# Altium PCB fpga.PcbDoc (part 3 of 6)
Units mm, origin at the board's own origin, x right, y up, seen from the top; angles counter-clockwise.
Board outline 111.63 x 111 mm, 2 copper layers (Top Layer, Bottom Layer); 5 components, 0 nets, 896 pads, 0 vias.
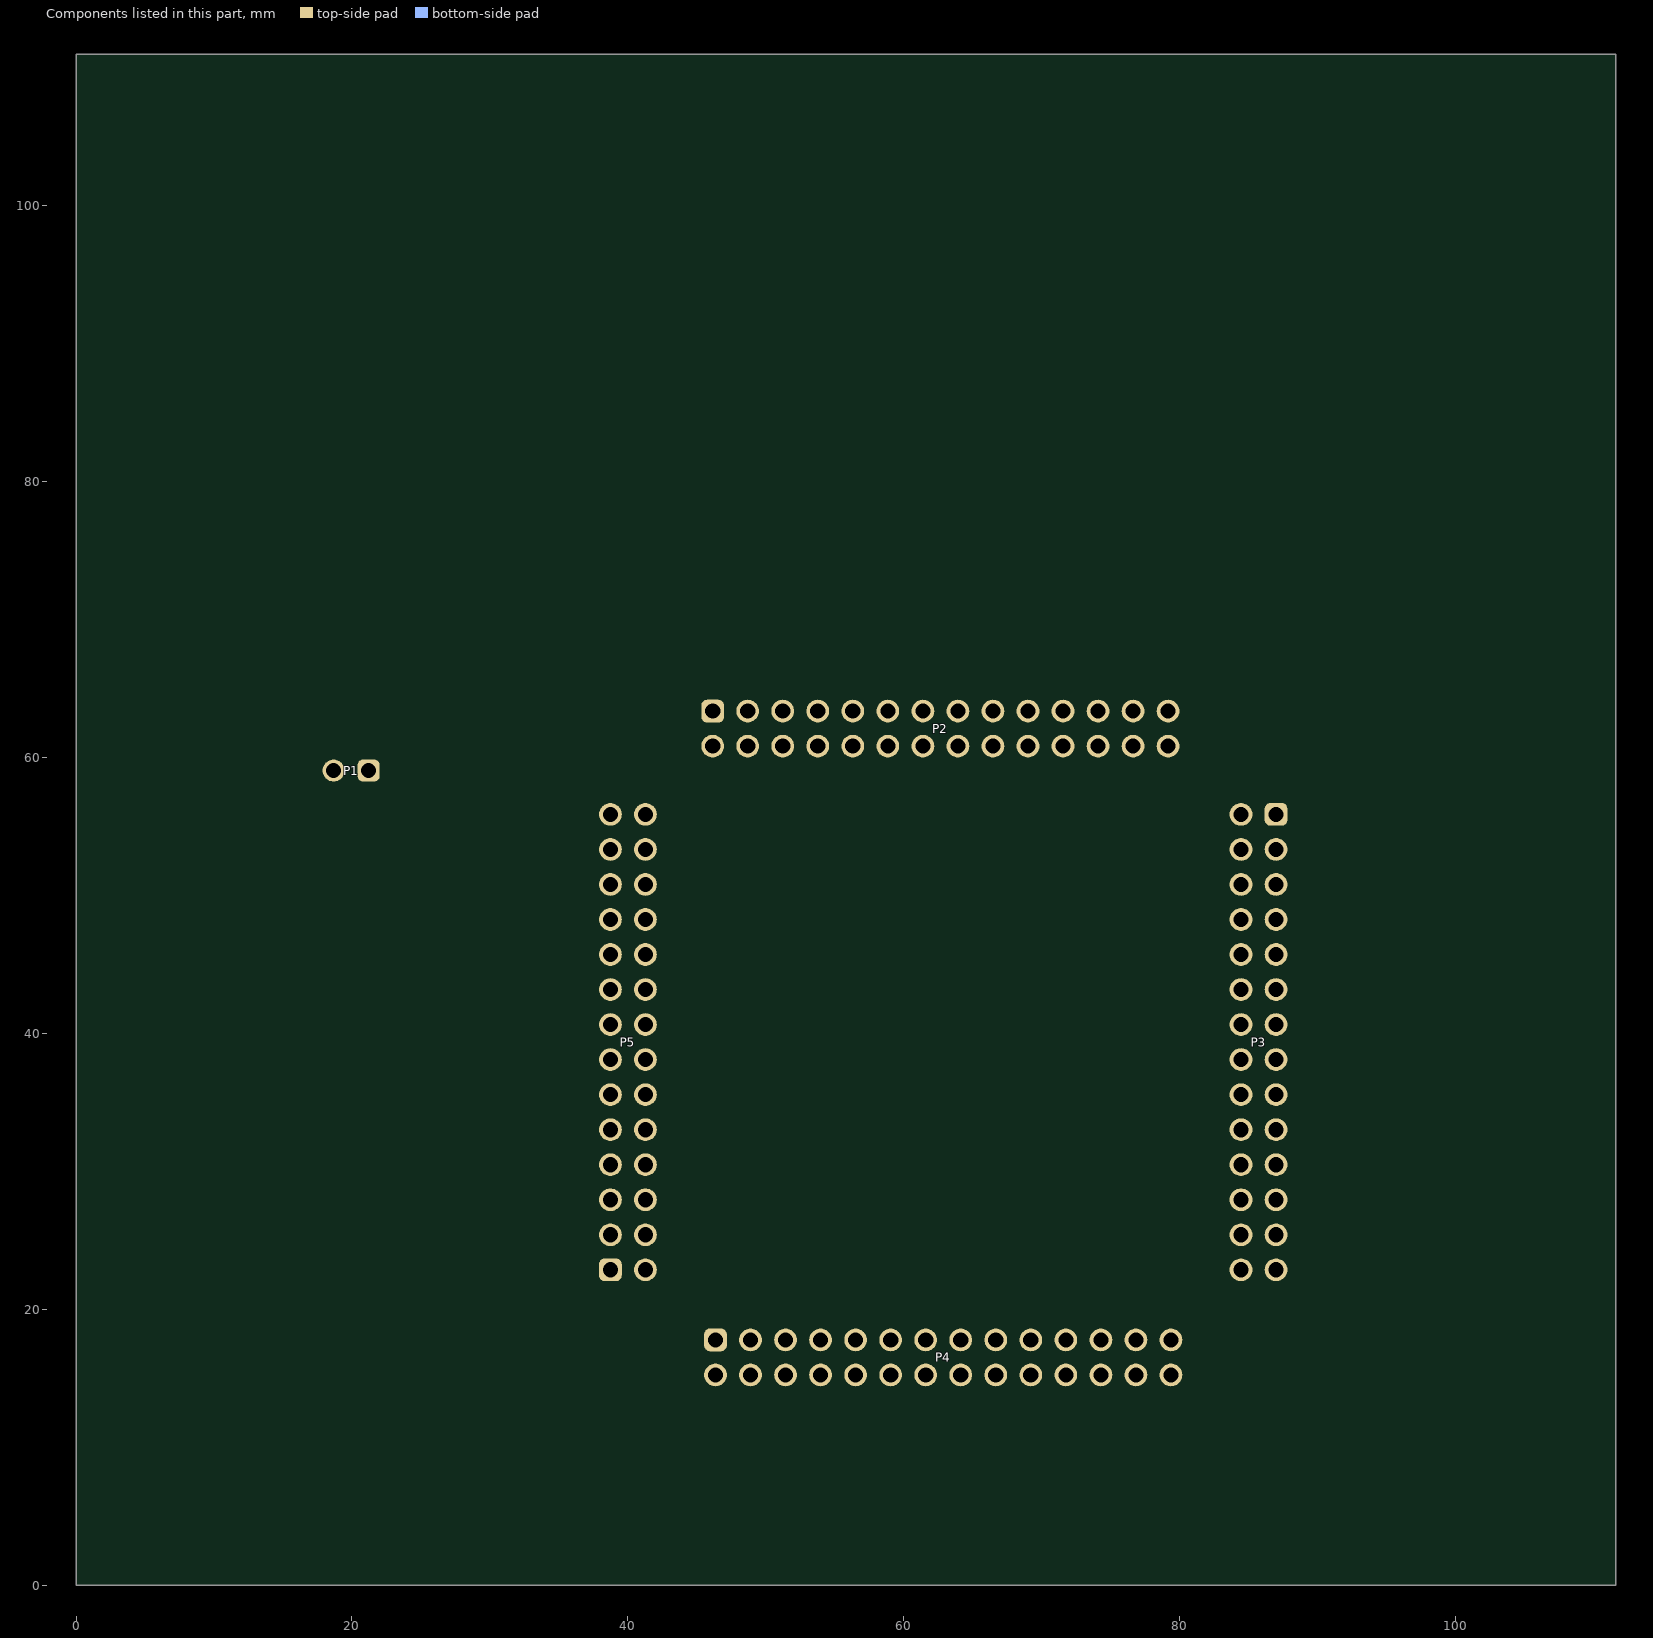
[diagram p3: the components of this part, seen from the top]

## Nets (pads, with @x,y where several pads share a name; then routed paths per layer and width w, separated by ;. In a path a pad name is that pad's centre, name@x,y a point inside that pad or via, vN(x,y) a via of type N, cw(c..) or ccw(c..) an arc to the next point about the centre after c; other vN are vias at no path point) (continued)
copper on no net: (continued)
  Top Layer w0.027: 13.047,38.27 13.047,37.995 ; 13.047,39.52 13.047,39.245 ; 13.047,40.42 13.047,40.695 ; 13.047,41.57 13.047,41.845 ; 13.047,42.42 13.022,42.445 ; 13.047,43.295 12.997,43.345 ; 13.047,44.17 13.047,44.445 ; 13.072,33.47 13.072,33.195 ; 13.072,33.845 13.097,33.82 ; 13.072,34.445 13.072,34.77 ; 13.072,34.72 13.097,34.695 ; 13.072,34.745 13.022,34.745 ; 13.072,35.295 13.072,35.57 ; 13.072,36.645 13.122,36.595 ; 13.072,36.67 13.022,36.67 ; 13.072,38.545 13.047,38.52 ; 13.072,39.245 13.072,39.52 ; 13.072,39.895 13.072,40.145 ; 13.072,40.42 13.097,40.395 ; 13.072,40.67 13.047,40.695 ; 13.072,41.02 13.097,40.995 ; 13.072,41.57 13.097,41.545 ; 13.072,41.82 13.047,41.845 ; 13.072,42.42 13.122,42.37 ; 13.072,42.445 13.022,42.445 ; 13.072,43.02 13.072,43.295 ; 13.072,44.42 13.047,44.445 ; 13.097,34.12 13.097,33.82 ; 13.097,35.545 13.072,35.57 ; 13.097,35.895 13.072,35.87 ; 13.097,36.045 13.072,36.07 ; 13.097,38.545 13.097,38.745 ; 13.097,39.495 13.072,39.52 ; 13.097,39.895 13.122,39.87 ; 13.097,40.12 13.072,40.145 ; 13.097,40.67 13.097,40.395 ; 13.097,41.82 13.097,41.545 ; 13.097,43.02 13.272,42.845 13.347,42.845 13.347,42.17 13.322,42.145 ; 13.097,43.27 13.072,43.295 ; 13.097,44.17 13.147,44.12 ; 13.122,33.82 13.147,33.795 ; 13.122,34.445 13.297,34.27 13.372,34.27 13.372,33.87 ; 13.122,35.295 13.247,35.17 13.322,35.17 13.322,35.045 ; 13.122,35.895 13.122,36.045 ; 13.122,36.345 13.222,36.245 13.297,36.245 ; 13.122,37.22 13.272,37.07 13.347,37.07 13.347,36.395 13.322,36.37 ; 13.122,37.995 13.247,37.87 13.322,37.87 13.322,37.745 13.422,37.745 13.422,37.295 13.372,37.245 ; 13.122,39.245 13.147,39.22 ; 13.122,41.245 13.097,41.27 ; 13.122,41.545 13.122,41.82 ; 13.122,42.12 13.322,41.92 13.397,41.92 13.397,41.52 ; 13.122,43.27 13.122,42.995 13.447,42.995 ; 13.122,44.42 13.122,44.145 13.297,44.145 ; 13.147,34.695 13.147,34.42 13.222,34.42 ; 13.147,35.545 13.147,35.27 13.247,35.27 13.272,35.295 ; 13.147,37.495 13.147,37.195 13.247,37.195 ; 13.147,38.27 13.147,37.97 13.247,37.97 ; 13.147,38.57 13.122,38.545 ; 13.147,39.495 13.147,39.22 ; 13.147,40.095 13.122,40.12 ; 13.147,41.545 13.172,41.52 ; 13.147,41.795 13.122,41.82 ; 13.147,43.27 13.147,42.97 13.247,42.97 ; 13.147,44.42 13.147,44.12 ; 13.172,33.795 13.222,33.745 ; 13.172,34.095 13.147,34.12 ; 13.172,34.695 13.172,34.395 13.247,34.395 13.247,34.32 13.322,34.32 13.322,33.87 ; 13.172,35.545 13.172,35.245 13.247,35.245 13.422,35.07 ; 13.172,35.92 13.147,35.895 ; 13.172,37.495 13.172,37.17 13.272,37.17 13.272,37.045 ; 13.172,38.27 13.172,37.945 13.272,37.945 ; 13.172,39.22 13.172,39.495 ; 13.172,40.395 13.172,40.67 ; 13.172,40.995 13.197,40.97 ; 13.172,41.795 13.172,41.52 ; 13.172,44.12 13.272,44.02 13.347,44.02 13.347,43.52 ; 13.172,44.795 13.172,44.77 13.272,44.77 13.272,44.67 13.372,44.67 ; 13.197,34.095 13.197,33.77 13.297,33.77 13.297,33.67 13.397,33.67 13.397,33.245 13.372,33.22 ; 13.197,34.695 13.197,34.37 13.272,34.37 13.272,34.295 13.347,34.295 13.347,33.87 ; 13.197,35.545 13.197,35.22 13.272,35.22 13.272,35.12 13.372,35.12 13.372,34.495 12.897,34.495 ; 13.197,35.92 13.347,35.77 13.447,35.77 ; 13.197,36.02 13.247,36.07 ; 13.197,37.495 13.197,37.145 13.297,37.145 13.297,37.02 13.397,37.02 13.397,36.42 12.847,36.42 ; 13.197,38.27 13.197,37.92 13.272,37.92 13.397,37.795 ; 13.197,39.47 13.172,39.495 ; 13.197,40.645 13.172,40.67 ; 13.197,43.545 13.197,43.82 ; 13.197,44.42 13.197,44.095 13.272,44.095 13.272,43.995 ; 13.197,44.795 13.197,44.745 13.297,44.745 13.297,44.62 ; 13.222,35.545 13.222,35.195 13.297,35.195 13.297,35.095 13.397,35.095 13.397,34.52 12.847,34.52 ; 13.222,37.495 13.222,37.12 13.322,37.12 ; 13.222,38.27 13.222,37.895 13.297,37.895 13.297,37.77 ; 13.222,41.22 13.197,41.245 ; 13.222,41.52 13.222,41.795 ; 13.222,43.245 13.222,42.895 13.322,42.895 ; 13.222,43.545 13.247,43.52 ; 13.222,43.795 13.197,43.82 ; 13.222,44.42 13.222,44.07 13.297,44.07 13.297,43.97 13.397,43.97 13.397,43.52 ; 13.222,44.795 13.222,44.72 13.322,44.72 13.322,44.17 13.297,44.145 ; 13.247,33.47 13.322,33.545 13.497,33.545 ; 13.247,33.745 13.272,33.72 13.347,33.72 13.347,33.22 13.322,33.195 ; 13.247,33.795 13.222,33.82 13.097,33.82 ; 13.247,35.545 13.247,35.145 ; 13.247,36.095 13.322,36.095 ; 13.247,36.17 13.322,36.17 ; 13.247,36.195 13.222,36.22 ; 13.247,39.22 13.272,39.195 ; 13.247,41.77 13.222,41.795 ; 13.247,43.245 13.247,42.87 13.322,42.87 13.422,42.77 ; 13.247,43.795 13.247,43.52 ; 13.272,33.195 13.272,33.495 13.497,33.495 13.522,33.47 ; 13.272,34.12 13.322,34.17 13.472,34.17 ; 13.272,38.87 13.322,38.87 ; 13.272,38.895 13.072,39.095 13.072,39.17 12.947,39.17 ; 13.272,40.97 13.297,40.945 ; 13.272,42.995 13.247,42.97 ; 13.297,33.195 13.297,33.52 13.497,33.52 ; 13.297,33.87 13.297,34.145 13.472,34.145 13.497,34.12 ; 13.297,35.545 13.372,35.62 ; 13.297,36.07 13.322,36.095 ; 13.297,36.195 13.322,36.17 ; 13.297,36.22 13.222,36.22 ; 13.297,36.37 13.297,36.695 13.522,36.695 ; 13.297,38.02 13.247,37.97 ; 13.297,38.295 13.372,38.37 ; 13.297,38.895 13.322,38.87 ; 13.297,38.92 13.247,38.92 13.247,39.02 13.147,39.02 13.147,39.12 ; 13.297,39.445 13.272,39.47 ; 13.297,41.77 13.347,41.82 13.472,41.82 13.472,41.545 ; 13.297,42.145 13.297,42.47 13.522,42.47 ; 13.297,43.795 13.347,43.845 ; 13.297,44.645 13.147,44.795 13.247,44.795 ; 13.322,33.595 13.472,33.595 ; 13.322,33.62 13.447,33.62 13.447,33.27 12.897,33.27 ; 13.322,34.195 13.447,34.195 13.447,33.895 ; 13.322,34.47 13.322,34.82 ; 13.322,34.795 13.222,34.695 13.222,34.345 13.297,34.345 13.297,34.245 ; 13.322,35.295 13.322,35.57 13.522,35.57 ; 13.322,36.72 13.247,36.645 13.247,36.345 13.072,36.345 ; 13.322,38.02 13.322,38.32 13.522,38.32 ; 13.322,41.195 13.297,41.22 ; 13.322,41.52 13.322,41.795 13.497,41.795 ; 13.322,42.495 13.247,42.42 13.247,41.995 13.347,41.995 ; 13.322,43.52 13.322,43.82 13.497,43.82 ; 13.322,44.495 13.247,44.42 13.247,44.045 13.322,44.045 13.322,43.945 13.422,43.945 ; 13.322,44.52 13.472,44.52 ; 13.322,44.57 13.447,44.57 ; 13.347,34.92 13.497,34.92 ; 13.347,34.97 13.472,34.97 ; 13.347,36.845 13.497,36.845 ; 13.347,36.92 13.472,36.92 ; 13.347,37.245 13.347,37.845 13.247,37.845 ; 13.347,37.595 13.247,37.495 13.247,37.095 13.322,37.095 13.422,36.995 ; 13.347,37.62 13.497,37.62 ; 13.347,37.67 13.472,37.67 ; 13.347,39.445 13.447,39.545 ; 13.347,41.52 13.347,41.995 ; 13.347,42.62 13.497,42.62 ; 13.347,42.695 13.472,42.695 ; 13.347,43.87 13.472,43.87 ; 13.347,43.895 13.447,43.895 13.447,43.545 ; 13.347,43.92 13.272,43.995 ; 13.347,44.17 13.347,44.695 13.247,44.695 13.247,44.795 ; 13.372,35.67 13.497,35.67 ; 13.372,38.42 13.497,38.42 ; 13.372,41.52 13.372,41.945 13.297,41.945 13.297,42.045 13.197,42.045 13.197,42.395 13.222,42.42 ; 13.372,43.52 13.372,43.995 13.272,43.995 ; 13.372,44.645 13.447,44.57 ; 13.422,39.17 13.422,39.52 13.497,39.52 ; 13.422,43.92 13.472,43.87 ; 13.447,34.995 13.472,34.97 ; 13.447,37.695 13.472,37.67 ; 13.447,39.17 13.447,39.87 ; 13.447,39.57 13.522,39.57 ; 13.447,39.645 13.422,39.67 ; 13.447,40.395 13.447,40.645 ; 13.447,41.845 13.497,41.795 ; 13.447,43.245 13.447,42.995 ; 13.447,44.545 13.472,44.52 ; 13.472,33.57 13.497,33.545 ; 13.472,34.945 13.497,34.92 ; 13.472,35.695 13.497,35.67 ; 13.472,36.87 13.497,36.845 ; 13.472,37.645 13.497,37.62 ; 13.472,38.445 13.497,38.42 ; 13.472,39.42 13.447,39.445 ; 13.472,40.395 13.472,40.62 ; 13.472,40.57 12.572,40.57 12.572,40.82 ; 13.472,40.92 13.472,41.17 12.522,41.17 ; 13.472,41.12 12.547,41.12 ; 13.472,41.145 12.547,41.145 12.522,41.17 ; 13.472,42.645 13.497,42.62 ; 13.472,43.17 12.597,43.17 ; 13.472,43.195 12.572,43.195 ; 13.472,43.845 13.497,43.82 ; 13.472,44.495 13.497,44.47 ; 13.497,34.87 13.522,34.845 ; 13.497,35.62 13.522,35.595 ; 13.497,36.57 12.672,36.57 12.672,36.695 12.572,36.695 ; 13.497,36.795 13.522,36.77 ; 13.497,38.17 12.722,38.17 12.722,38.37 ; 13.497,38.37 13.522,38.345 ; 13.497,39.17 13.522,39.145 ; 13.497,39.545 13.522,39.57 ; 13.497,40.395 13.497,40.52 ; 13.497,40.47 12.822,40.47 ; 13.497,40.495 12.747,40.495 ; 13.497,40.97 13.197,40.97 ; 13.497,40.995 13.097,40.995 ; 13.497,41.02 12.972,41.02 ; 13.497,41.045 12.822,41.045 ; 13.497,42.345 12.672,42.345 12.672,42.47 12.572,42.47 ; 13.497,42.57 13.522,42.545 ; 13.497,43.02 13.497,43.12 ; 13.497,43.07 12.822,43.07 ; 13.497,43.095 12.772,43.095 ; 13.497,43.795 12.522,43.795 ; 13.522,33.395 12.722,33.395 12.722,33.62 12.547,33.62 ; 13.522,33.42 12.697,33.42 12.697,33.645 ; 13.522,33.445 12.672,33.445 12.672,33.645 12.622,33.695 12.522,33.695 ; 13.522,34.02 12.297,34.02 ; 13.522,34.045 12.197,34.045 ; 13.522,34.72 13.247,34.72 13.247,34.445 13.222,34.42 ; 13.522,34.745 13.272,34.745 13.272,34.445 ; 13.522,34.77 13.297,34.77 13.297,34.47 13.272,34.445 ; 13.522,34.82 13.322,34.82 ; 13.522,36.645 13.222,36.645 ; 13.522,36.67 13.272,36.67 13.272,36.37 13.222,36.32 ; 13.522,36.745 13.322,36.745 ; 13.522,37.445 12.222,37.445 ; 13.522,37.47 12.172,37.47 ; 13.522,37.495 12.122,37.495 ; 13.522,37.52 13.272,37.52 13.272,37.22 13.247,37.195 ; 13.522,38.245 12.647,38.245 12.647,38.42 12.547,38.42 ; 13.522,38.27 12.622,38.27 ; 13.522,38.295 13.272,38.295 ; 13.522,39.42 13.522,39.145 ; 13.522,39.67 13.422,39.67 ; 13.522,41.645 12.572,41.645 12.572,41.87 12.597,41.895 ; 13.522,41.67 12.547,41.67 ; 13.522,42.42 13.222,42.42 ; 13.522,42.445 13.272,42.445 13.272,42.145 13.247,42.12 13.072,42.12 ; 13.522,42.52 13.322,42.52 ; 13.522,43.67 12.597,43.67 12.572,43.695 ; 13.522,43.695 12.572,43.695 ; 13.522,43.72 12.572,43.72 12.547,43.745 ; 13.522,44.345 12.422,44.345 ; 13.522,44.37 12.347,44.37 ; 13.522,44.395 12.247,44.395 ; 13.547,39.145 13.547,39.42 ; 13.572,39.395 13.547,39.42 ; 13.622,39.145 13.647,39.12 ; 13.672,39.37 13.647,39.395 ; 13.772,39.12 13.797,39.095 ; 13.822,39.345 13.797,39.37 ; 13.922,39.095 13.947,39.07 ; 13.972,39.32 13.947,39.345 ; 14.047,39.07 14.047,39.32 12.722,39.32 12.722,39.695 ; 14.047,39.27 12.797,39.27 ; 14.047,39.295 12.747,39.295 ; 14.072,39.12 13.647,39.12 ; 14.072,39.145 13.522,39.145 ; 14.072,39.17 13.397,39.17 ; 14.072,39.195 13.272,39.195 ; 14.272,20.995 14.297,21.02 ; 14.272,45.395 14.297,45.37 ; 14.322,20.92 14.297,20.895 ; 14.322,45.47 14.297,45.495 ; 14.472,20.995 14.447,20.97 ; 14.472,21.12 14.497,21.145 ; 14.497,20.995 14.497,21.195 ; 14.522,21.07 14.497,21.045 14.372,21.045 14.372,20.945 14.347,20.92 ; 14.522,21.195 14.547,21.22 14.522,21.245 ; 14.547,21.07 14.547,45.345 14.372,45.345 14.372,45.445 14.347,45.47 ; 14.547,45.32 14.397,45.32 14.397,45.445 ; 14.597,21.195 14.497,21.195 ; 14.597,21.22 14.622,21.245 14.622,45.145 14.597,45.17 ; 14.597,45.195 14.522,45.195 14.522,45.345 14.497,45.37 14.297,45.37 ; 14.597,45.22 14.472,45.22 14.497,45.245 14.447,45.295 14.447,45.445 14.422,45.42 ; 2.772,21.195 2.897,21.195 2.922,21.22 ; 2.772,21.195 2.797,21.22 ; 2.772,21.195 2.847,21.12 2.822,21.095 2.997,21.095 2.997,20.945 ; 2.772,21.245 2.897,21.245 ; 2.772,21.245 2.797,21.27 2.772,21.295 ; 2.772,21.245 2.797,21.22 ; 2.772,21.295 2.797,21.32 2.772,21.345 ; 2.772,21.345 2.797,21.37 2.772,21.395 ; 2.772,21.395 2.797,21.42 2.772,21.445 ; 2.772,21.445 2.797,21.47 2.772,21.495 ; 2.772,21.495 2.797,21.52 2.772,21.545 ; 2.772,21.545 2.797,21.57 2.772,21.595 ; 2.772,21.595 2.797,21.62 2.772,21.645 ; 2.772,21.645 2.797,21.67 2.772,21.695 ; 2.772,21.695 2.797,21.72 2.772,21.745 ; 2.772,21.745 2.797,21.77 2.772,21.795 ; 2.772,21.795 2.797,21.82 2.772,21.845 ; 2.772,21.845 2.797,21.87 2.772,21.895 ; 2.772,21.895 2.797,21.92 2.772,21.945 ; 2.772,21.945 2.797,21.97 2.772,21.995 ; 2.772,21.995 2.797,22.02 2.772,22.045 ; 2.772,22.045 2.797,22.07 2.772,22.095 ; 2.772,22.095 2.797,22.12 2.772,22.145 ; 2.772,22.145 2.797,22.17 2.772,22.195 ; 2.772,22.195 2.797,22.22 2.772,22.245 ; 2.772,22.245 2.797,22.27 2.772,22.295 ; 2.772,22.295 2.797,22.32 2.772,22.345 ; 2.772,22.345 2.797,22.37 2.772,22.395 ; 2.772,22.395 2.797,22.42 2.772,22.445 ; 2.772,22.445 2.797,22.47 2.772,22.495 ; 2.772,22.495 2.797,22.52 2.772,22.545 ; 2.772,22.545 2.797,22.57 2.772,22.595 ; 2.772,22.595 2.797,22.62 2.772,22.645 ; 2.772,22.645 2.797,22.67 2.772,22.695 ; 2.772,22.695 2.797,22.72 2.772,22.745 ; 2.772,22.745 2.797,22.77 2.772,22.795 ; 2.772,22.795 2.797,22.82 2.772,22.845 ; 2.772,22.845 2.797,22.87 2.772,22.895 ; 2.772,22.895 2.797,22.92 2.772,22.945 ; 2.772,22.945 2.797,22.97 2.772,22.995 ; 2.772,22.995 2.797,23.02 2.772,23.045 ; 2.772,23.045 2.797,23.07 2.772,23.095 ; 2.772,23.095 2.797,23.12 2.772,23.145 ; 2.772,23.145 2.797,23.17 2.772,23.195 ; 2.772,23.195 2.797,23.22 2.772,23.245 ; 2.772,23.245 2.797,23.27 2.772,23.295 ; 2.772,23.295 2.797,23.32 2.772,23.345 ; 2.772,23.345 2.797,23.37 2.772,23.395 ; 2.772,23.395 2.797,23.42 2.772,23.445 ; 2.772,23.445 2.797,23.47 2.772,23.495 ; 2.772,23.495 2.797,23.52 2.772,23.545 ; 2.772,23.545 2.797,23.57 2.772,23.595 ; 2.772,23.595 2.797,23.62 2.772,23.645 ; 2.772,23.645 2.797,23.67 2.772,23.695 ; 2.772,23.695 2.797,23.72 2.772,23.745 ; 2.772,23.745 2.797,23.77 2.772,23.795 ; 2.772,23.795 2.797,23.82 2.772,23.845 ; 2.772,23.845 2.797,23.87 2.772,23.895 ; 2.772,23.895 2.797,23.92 2.772,23.945 ; 2.772,23.945 2.797,23.97 2.772,23.995 ; 2.772,23.995 2.797,24.02 2.772,24.045 ; 2.772,24.045 2.797,24.07 2.772,24.095 ; 2.772,24.095 2.797,24.12 2.772,24.145 ; 2.772,24.145 2.797,24.17 2.772,24.195 ; 2.772,24.195 2.797,24.22 2.772,24.245 ; 2.772,24.245 2.797,24.27 2.772,24.295 ; 2.772,24.295 2.797,24.32 2.772,24.345 ; 2.772,24.345 2.797,24.37 2.772,24.395 ; 2.772,24.395 2.797,24.42 2.772,24.445 ; 2.772,24.445 2.797,24.47 2.772,24.495 ; 2.772,24.495 2.797,24.52 2.772,24.545 ; 2.772,24.545 2.797,24.57 2.772,24.595 ; 2.772,24.595 2.797,24.62 2.772,24.645 ; 2.772,24.645 2.797,24.67 2.772,24.695 ; 2.772,24.695 2.797,24.72 2.772,24.745 ; 2.772,24.745 2.797,24.77 2.772,24.795 ; 2.772,24.795 2.797,24.82 2.772,24.845 ; 2.772,24.845 2.797,24.87 2.772,24.895 ; 2.772,24.895 2.797,24.92 2.772,24.945 ; 2.772,24.945 2.797,24.97 2.772,24.995 ; 2.772,24.995 2.797,25.02 2.772,25.045 ; 2.772,25.045 2.797,25.07 2.772,25.095 ; 2.772,25.095 2.797,25.12 2.772,25.145 ; 2.772,25.145 2.797,25.17 2.772,25.195 ; 2.772,25.195 2.797,25.22 2.772,25.245 ; 2.772,25.245 2.797,25.27 2.772,25.295 ; 2.772,25.295 2.797,25.32 2.772,25.345 ; 2.772,25.345 2.797,25.37 2.772,25.395 ; 2.772,25.395 2.797,25.42 2.772,25.445 ; 2.772,25.445 2.797,25.47 2.772,25.495 ; 2.772,25.495 2.797,25.52 2.772,25.545 ; 2.772,25.545 2.797,25.57 2.772,25.595 ; 2.772,25.595 2.797,25.62 2.772,25.645 ; 2.772,25.645 2.797,25.67 2.772,25.695 ; 2.772,25.695 2.797,25.72 2.772,25.745 ; 2.772,25.745 2.797,25.77 2.772,25.795 ; 2.772,25.795 2.797,25.82 2.772,25.845 ; 2.772,25.845 2.797,25.87 2.772,25.895 ; 2.772,25.895 2.797,25.92 2.772,25.945 ; 2.772,25.945 2.797,25.97 2.772,25.995 ; 2.772,25.995 2.797,26.02 2.772,26.045 ; 2.772,26.045 2.797,26.07 2.772,26.095 ; 2.772,26.095 2.797,26.12 2.772,26.145 ; 2.772,26.145 2.797,26.17 2.772,26.195 ; 2.772,26.195 2.797,26.22 2.772,26.245 ; 2.772,26.245 2.797,26.27 2.772,26.295 ; 2.772,26.295 2.797,26.32 2.772,26.345 ; 2.772,26.345 2.797,26.37 2.772,26.395 ; 2.772,26.395 2.797,26.42 2.772,26.445 ; 2.772,26.445 2.797,26.47 2.772,26.495 ; 2.772,26.495 2.797,26.52 2.772,26.545 ; 2.772,26.545 2.797,26.57 2.772,26.595 ; 2.772,26.595 2.797,26.62 2.772,26.645 ; 2.772,26.645 2.797,26.67 2.772,26.695 ; 2.772,26.695 2.797,26.72 2.772,26.745 ; 2.772,26.745 2.797,26.77 2.772,26.795 ; 2.772,26.795 2.797,26.82 2.772,26.845 ; 2.772,26.845 2.797,26.87 2.772,26.895 ; 2.772,26.895 2.797,26.92 2.772,26.945 ; 2.772,26.945 2.797,26.97 2.772,26.995 ; 2.772,26.995 2.797,27.02 2.772,27.045 ; 2.772,27.045 2.797,27.07 2.772,27.095 ; 2.772,27.095 2.797,27.12 2.772,27.145 ; 2.772,27.145 2.797,27.17 2.772,27.195 ; 2.772,27.195 2.797,27.22 2.772,27.245 ; 2.772,27.245 2.797,27.27 2.772,27.295 ; 2.772,27.295 2.797,27.32 2.772,27.345 ; 2.772,27.345 2.797,27.37 2.772,27.395 ; 2.772,27.395 2.797,27.42 2.772,27.445 ; 2.772,27.445 2.797,27.47 2.772,27.495 ; 2.772,27.495 2.797,27.52 2.772,27.545 ; 2.772,27.545 2.797,27.57 2.772,27.595 ; 2.772,27.595 2.797,27.62 2.772,27.645 ; 2.772,27.645 2.797,27.67 2.772,27.695 ; 2.772,27.695 2.797,27.72 2.772,27.745 ; 2.772,27.745 2.797,27.77 2.772,27.795 ; 2.772,27.795 2.797,27.82 2.772,27.845 ; 2.772,27.845 2.797,27.87 2.772,27.895 ; 2.772,27.895 2.797,27.92 2.772,27.945 ; 2.772,27.945 2.797,27.97 2.772,27.995 ; 2.772,27.995 2.797,28.02 2.772,28.045 ; 2.772,28.045 2.797,28.07 2.772,28.095 ; 2.772,28.095 2.797,28.12 2.772,28.145 ; 2.772,28.145 2.797,28.17 2.772,28.195 ; 2.772,28.195 2.797,28.22 2.772,28.245 ; 2.772,28.245 2.797,28.27 2.772,28.295 ; 2.772,28.295 2.797,28.32 2.772,28.345 ; 2.772,28.345 2.797,28.37 2.772,28.395 ; 2.772,28.395 2.797,28.42 2.772,28.445 ; 2.772,28.445 2.797,28.47 2.772,28.495 ; 2.772,28.495 2.797,28.52 2.772,28.545 ; 2.772,28.545 2.797,28.57 2.772,28.595 ; 2.772,28.595 2.797,28.62 2.772,28.645 ; 2.772,28.645 2.797,28.67 2.772,28.695 ; 2.772,28.695 2.797,28.72 2.772,28.745 ; 2.772,28.745 2.797,28.77 2.772,28.795 ; 2.772,28.795 2.797,28.82 2.772,28.845 ; 2.772,28.845 2.797,28.87 2.772,28.895 ; 2.772,28.895 2.797,28.92 2.772,28.945 ; 2.772,28.945 2.797,28.97 2.772,28.995 ; 2.772,28.995 2.797,29.02 2.772,29.045 ; 2.772,29.045 2.797,29.07 2.772,29.095 ; 2.772,29.095 2.797,29.12 2.772,29.145 ; 2.772,29.145 2.797,29.17 2.772,29.195 ; 2.772,29.195 2.797,29.22 2.772,29.245 ; 2.772,29.245 2.797,29.27 2.772,29.295 ; 2.772,29.295 2.797,29.32 2.772,29.345 ; 2.772,29.345 2.797,29.37 2.772,29.395 ; 2.772,29.395 2.797,29.42 2.772,29.445 ; 2.772,29.445 2.797,29.47 2.772,29.495 ; 2.772,29.495 2.797,29.52 2.772,29.545 ; 2.772,29.545 2.797,29.57 2.772,29.595 ; 2.772,29.595 2.797,29.62 2.772,29.645 ; 2.772,29.645 2.797,29.67 2.772,29.695 ; 2.772,29.695 2.797,29.72 2.772,29.745 ; 2.772,29.745 2.797,29.77 2.772,29.795 ; 2.772,29.795 2.797,29.82 2.772,29.845 ; 2.772,29.845 2.797,29.87 2.772,29.895 ; 2.772,29.895 2.797,29.92 2.772,29.945 ; 2.772,29.945 2.797,29.97 2.772,29.995 ; 2.772,29.995 2.797,30.02 2.772,30.045 ; 2.772,30.045 2.797,30.07 2.772,30.095 ; 2.772,30.095 2.797,30.12 2.772,30.145 ; 2.772,30.145 2.797,30.17 2.772,30.195 ; 2.772,30.195 2.797,30.22 2.772,30.245 ; 2.772,30.245 2.797,30.27 2.772,30.295 ; 2.772,30.295 2.797,30.32 2.772,30.345 ; 2.772,30.345 2.797,30.37 2.772,30.395 ; 2.772,30.395 2.797,30.42 2.772,30.445 ; 2.772,30.445 2.797,30.47 2.772,30.495 ; 2.772,30.495 2.797,30.52 2.772,30.545 ; 2.772,30.545 2.797,30.57 2.772,30.595 ; 2.772,30.595 2.797,30.62 2.772,30.645 ; 2.772,30.645 2.797,30.67 2.772,30.695 ; 2.772,30.695 2.797,30.72 2.772,30.745 ; 2.772,30.745 2.797,30.77 2.772,30.795 ; 2.772,30.795 2.797,30.82 2.772,30.845 ; 2.772,30.845 2.797,30.87 2.772,30.895 ; 2.772,30.895 2.797,30.92 2.772,30.945 ; 2.772,30.945 2.797,30.97 2.772,30.995 ; 2.772,30.995 2.797,31.02 2.772,31.045 ; 2.772,31.045 2.797,31.07 2.772,31.095 ; 2.772,31.095 2.797,31.12 2.772,31.145 ; 2.772,31.145 2.797,31.17 2.772,31.195 ; 2.772,31.195 2.797,31.22 2.772,31.245 ; 2.772,31.245 2.797,31.27 2.772,31.295 ; 2.772,31.295 2.797,31.32 2.772,31.345 ; 2.772,31.345 2.797,31.37 2.772,31.395 ; 2.772,31.395 2.797,31.42 2.772,31.445 ; 2.772,31.445 2.797,31.47 2.772,31.495 ; 2.772,31.495 2.797,31.52 2.772,31.545 ; 2.772,31.545 2.797,31.57 2.772,31.595 ; 2.772,31.595 2.797,31.62 2.772,31.645 ; 2.772,31.645 2.797,31.67 2.772,31.695 ; 2.772,31.695 2.797,31.72 2.772,31.745 ; 2.772,31.745 2.797,31.77 2.772,31.795 ; 2.772,31.795 2.797,31.82 2.772,31.845 ; 2.772,31.845 2.797,31.87 2.772,31.895 ; 2.772,31.895 2.797,31.92 2.772,31.945 ; 2.772,31.945 2.797,31.97 2.772,31.995 ; 2.772,31.995 2.797,32.02 2.772,32.045 ; 2.772,32.045 2.797,32.07 2.772,32.095 ; 2.772,32.095 2.797,32.12 2.772,32.145 ; 2.772,32.145 2.797,32.17 2.772,32.195 ; 2.772,32.195 2.797,32.22 2.772,32.245 ; 2.772,32.245 2.797,32.27 2.772,32.295 ; 2.772,32.295 2.797,32.32 2.772,32.345 ; 2.772,32.345 2.797,32.37 2.772,32.395 ; 2.772,32.395 2.797,32.42 2.772,32.445 ; 2.772,32.445 2.797,32.47 2.772,32.495 ; 2.772,32.495 2.797,32.52 2.772,32.545 ; 2.772,32.545 2.797,32.57 2.772,32.595 ; 2.772,32.595 2.797,32.62 2.772,32.645 ; 2.772,32.645 2.797,32.67 2.772,32.695 ; 2.772,32.695 2.797,32.72 2.772,32.745 ; 2.772,32.745 2.797,32.77 2.772,32.795 ; 2.772,32.795 2.797,32.82 2.772,32.845 ; 2.772,32.845 2.797,32.87 2.772,32.895 ; 2.772,32.895 2.797,32.92 2.772,32.945 ; 2.772,32.945 2.797,32.97 2.772,32.995 ; 2.772,32.995 2.797,33.02 2.772,33.045 ; 2.772,33.045 2.797,33.07 2.772,33.095 ; 2.772,33.095 2.797,33.12 2.772,33.145 ; 2.772,33.145 2.797,33.17 2.772,33.195 ; 2.772,33.195 2.797,33.22 2.772,33.245 ; 2.772,33.245 2.797,33.27 2.772,33.295 ; 2.772,33.295 2.797,33.32 2.772,33.345 ; 2.772,33.345 2.797,33.37 2.772,33.395 ; 2.772,33.395 2.797,33.42 2.772,33.445 ; 2.772,33.445 2.797,33.47 2.772,33.495 ; 2.772,33.495 2.797,33.52 2.772,33.545 ; 2.772,33.545 2.797,33.57 2.772,33.595 ; 2.772,33.595 2.797,33.62 2.772,33.645 ; 2.772,33.645 2.797,33.67 2.772,33.695 ; 2.772,33.695 2.797,33.72 2.772,33.745 ; 2.772,33.745 2.797,33.77 2.772,33.795 ; 2.772,33.795 2.797,33.82 2.772,33.845 ; 2.772,33.845 2.797,33.87 2.772,33.895 ; 2.772,33.895 2.797,33.92 2.772,33.945 ; 2.772,33.945 2.797,33.97 2.772,33.995 ; 2.772,33.995 2.797,34.02 2.772,34.045 ; 2.772,34.045 2.797,34.07 2.772,34.095 ; 2.772,34.095 2.797,34.12 2.772,34.145 ; 2.772,34.145 2.797,34.17 2.772,34.195 ; 2.772,34.195 2.797,34.22 2.772,34.245 ; 2.772,34.245 2.797,34.27 2.772,34.295 ; 2.772,34.295 2.797,34.32 2.772,34.345 ; 2.772,34.345 2.797,34.37 2.772,34.395 ; 2.772,34.395 2.797,34.42 2.772,34.445 ; 2.772,34.445 2.797,34.47 2.772,34.495 ; 2.772,34.495 2.797,34.52 2.772,34.545 ; 2.772,34.545 2.797,34.57 2.772,34.595 ; 2.772,34.595 2.797,34.62 2.772,34.645 ; 2.772,34.645 2.797,34.67 2.772,34.695 ; 2.772,34.695 2.797,34.72 2.772,34.745 ; 2.772,34.745 2.797,34.77 2.772,34.795 ; 2.772,34.795 2.797,34.82 2.772,34.845 ; 2.772,34.845 2.797,34.87 2.772,34.895 ; 2.772,34.895 2.797,34.92 2.772,34.945 ; 2.772,34.945 2.797,34.97 2.772,34.995 ; 2.772,34.995 2.797,35.02 2.772,35.045 ; 2.772,35.045 2.797,35.07 2.772,35.095 ; 2.772,35.095 2.797,35.12 2.772,35.145 ; 2.772,35.145 2.797,35.17 2.772,35.195 ; 2.772,35.195 2.797,35.22 2.772,35.245 ; 2.772,35.245 2.797,35.27 2.772,35.295 ; 2.772,35.295 2.797,35.32 2.772,35.345 ; 2.772,35.345 2.797,35.37 2.772,35.395 ; 2.772,35.395 2.797,35.42 2.772,35.445 ; 2.772,35.445 2.797,35.47 2.772,35.495 ; 2.772,35.495 2.797,35.52 2.772,35.545 ; 2.772,35.545 2.797,35.57 2.772,35.595 ; 2.772,35.595 2.797,35.62 2.772,35.645 ; 2.772,35.645 2.797,35.67 2.772,35.695 ; 2.772,35.695 2.797,35.72 2.772,35.745 ; 2.772,35.745 2.797,35.77 2.772,35.795 ; 2.772,35.795 2.797,35.82 2.772,35.845 ; 2.772,35.845 2.797,35.87 2.772,35.895 ; 2.772,35.895 2.797,35.92 2.772,35.945 ; 2.772,35.945 2.797,35.97 2.772,35.995 ; 2.772,35.995 2.797,36.02 2.772,36.045 ; 2.772,36.045 2.797,36.07 2.772,36.095 ; 2.772,36.095 2.797,36.12 2.772,36.145 ; 2.772,36.145 2.797,36.17 2.772,36.195 ; 2.772,36.195 2.797,36.22 2.772,36.245 ; 2.772,36.245 2.797,36.27 2.772,36.295 ; 2.772,36.295 2.797,36.32 2.772,36.345 ; 2.772,36.345 2.797,36.37 2.772,36.395 ; 2.772,36.395 2.797,36.42 2.772,36.445 ; 2.772,36.445 2.797,36.47 2.772,36.495 ; 2.772,36.495 2.797,36.52 2.772,36.545 ; 2.772,36.545 2.797,36.57 2.772,36.595 ; 2.772,36.595 2.797,36.62 2.772,36.645 ; 2.772,36.645 2.797,36.67 2.772,36.695 ; 2.772,36.695 2.797,36.72 2.772,36.745 ; 2.772,36.745 2.797,36.77 2.772,36.795 ; 2.772,36.795 2.797,36.82 2.772,36.845 ; 2.772,36.845 2.797,36.87 2.772,36.895 ; 2.772,36.895 2.797,36.92 2.772,36.945 ; 2.772,36.945 2.797,36.97 2.772,36.995 ; 2.772,36.995 2.797,37.02 2.772,37.045 ; 2.772,37.045 2.797,37.07 2.772,37.095 ; 2.772,37.095 2.797,37.12 2.772,37.145 ; 2.772,37.145 2.797,37.17 2.772,37.195 ; 2.772,37.195 2.797,37.22 2.772,37.245 ; 2.772,37.245 2.797,37.27 2.772,37.295 ; 2.772,37.295 2.797,37.32 2.772,37.345 ; 2.772,37.345 2.797,37.37 2.772,37.395 ; 2.772,37.395 2.797,37.42 2.772,37.445 ; 2.772,37.445 2.797,37.47 2.772,37.495 ; 2.772,37.495 2.797,37.52 2.772,37.545 ; 2.772,37.545 2.797,37.57 2.772,37.595 ; 2.772,37.595 2.797,37.62 2.772,37.645 ; 2.772,37.645 2.797,37.67 2.772,37.695 ; 2.772,37.695 2.797,37.72 2.772,37.745 ; 2.772,37.745 2.797,37.77 2.772,37.795 ; 2.772,37.795 2.797,37.82 2.772,37.845 ; 2.772,37.845 2.797,37.87 2.772,37.895 ; 2.772,37.895 2.797,37.92 2.772,37.945 ; 2.772,37.945 2.797,37.97 2.772,37.995 ; 2.772,37.995 2.797,38.02 2.772,38.045 ; 2.772,38.045 2.797,38.07 2.772,38.095 ; 2.772,38.095 2.797,38.12 2.772,38.145 ; 2.772,38.145 2.797,38.17 2.772,38.195 ; 2.772,38.195 2.797,38.22 2.772,38.245 ; 2.772,38.245 2.797,38.27 2.772,38.295 ; 2.772,38.295 2.797,38.32 2.772,38.345 ; 2.772,38.345 2.797,38.37 2.772,38.395 ; 2.772,38.395 2.797,38.42 2.772,38.445 ; 2.772,38.445 2.797,38.47 2.772,38.495 ; 2.772,38.495 2.797,38.52 2.772,38.545 ; 2.772,38.545 2.797,38.57 2.772,38.595 ; 2.772,38.595 2.797,38.62 2.772,38.645 ; 2.772,38.645 2.797,38.67 2.772,38.695 ; 2.772,38.695 2.797,38.72 2.772,38.745 ; 2.772,38.745 2.797,38.77 2.772,38.795 ; 2.772,38.795 2.797,38.82 2.772,38.845 ; 2.772,38.845 2.797,38.87 2.772,38.895 ; 2.772,38.895 2.797,38.92 2.772,38.945 ; 2.772,38.945 2.797,38.97 2.772,38.995 ; 2.772,38.995 2.797,39.02 2.772,39.045 ; 2.772,39.045 2.797,39.07 2.772,39.095 ; 2.772,39.095 2.797,39.12 2.772,39.145 ; 2.772,39.145 2.797,39.17 2.772,39.195 ; 2.772,39.195 2.797,39.22 2.772,39.245 ; 2.772,39.245 2.797,39.27 2.772,39.295 ; 2.772,39.295 2.797,39.32 2.772,39.345 ; 2.772,39.345 2.797,39.37 2.772,39.395 ; 2.772,39.395 2.797,39.42 2.772,39.445 ; 2.772,39.445 2.797,39.47 2.772,39.495 ; 2.772,39.495 2.797,39.52 2.772,39.545 ; 2.772,39.545 2.797,39.57 2.772,39.595 ; 2.772,39.595 2.797,39.62 2.772,39.645 ; 2.772,39.645 2.797,39.67 2.772,39.695 ; 2.772,39.695 2.797,39.72 2.772,39.745 ; 2.772,39.745 2.797,39.77 2.772,39.795 ; 2.772,39.795 2.797,39.82 2.772,39.845 ; 2.772,39.845 2.797,39.87 2.772,39.895 ; 2.772,39.895 2.797,39.92 2.772,39.945 ; 2.772,39.945 2.797,39.97 2.772,39.995 ; 2.772,39.995 2.797,40.02 2.772,40.045 ; 2.772,40.045 2.797,40.07 2.772,40.095 ; 2.772,40.095 2.797,40.12 2.772,40.145 ; 2.772,40.145 2.797,40.17 2.772,40.195 ; 2.772,40.195 2.797,40.22 2.772,40.245 ; 2.772,40.245 2.797,40.27 2.772,40.295 ; 2.772,40.295 2.797,40.32 2.772,40.345 ; 2.772,40.345 2.797,40.37 2.772,40.395 ; 2.772,40.395 2.797,40.42 2.772,40.445 ; 2.772,40.445 2.797,40.47 2.772,40.495 ; 2.772,40.495 2.797,40.52 2.772,40.545 ; 2.772,40.545 2.797,40.57 2.772,40.595 ; 2.772,40.595 2.797,40.62 2.772,40.645 ; 2.772,40.645 2.797,40.67 2.772,40.695 ; 2.772,40.695 2.797,40.72 2.772,40.745 ; 2.772,40.745 2.797,40.77 2.772,40.795 ; 2.772,40.795 2.797,40.82 2.772,40.845 ; 2.772,40.845 2.797,40.87 2.772,40.895 ; 2.772,40.895 2.797,40.92 2.772,40.945 ; 2.772,40.945 2.797,40.97 2.772,40.995 ; 2.772,40.995 2.797,41.02 2.772,41.045 ; 2.772,41.045 2.797,41.07 2.772,41.095 ; 2.772,41.095 2.797,41.12 2.772,41.145 ; 2.772,41.145 2.797,41.17 2.772,41.195 ; 2.772,41.195 2.797,41.22 2.772,41.245 ; 2.772,41.245 2.797,41.27 2.772,41.295 ; 2.772,41.295 2.797,41.32 2.772,41.345 ; 2.772,41.345 2.797,41.37 2.772,41.395 ; 2.772,41.395 2.797,41.42 2.772,41.445 ; 2.772,41.445 2.797,41.47 2.772,41.495 ; 2.772,41.495 2.797,41.52 2.772,41.545 ; 2.772,41.545 2.797,41.57 2.772,41.595 ; 2.772,41.595 2.797,41.62 2.772,41.645 ; 2.772,41.645 2.797,41.67 2.772,41.695 ; 2.772,41.695 2.797,41.72 2.772,41.745 ; 2.772,41.745 2.797,41.77 2.772,41.795 ; 2.772,41.795 2.797,41.82 2.772,41.845 ; 2.772,41.845 2.797,41.87 2.772,41.895 ; 2.772,41.895 2.797,41.92 2.772,41.945 ; 2.772,41.945 2.797,41.97 2.772,41.995 ; 2.772,41.995 2.797,42.02 2.772,42.045 ; 2.772,42.045 2.797,42.07 2.772,42.095 ; 2.772,42.095 2.797,42.12 2.772,42.145 ; 2.772,42.145 2.797,42.17 2.772,42.195 ; 2.772,42.195 2.797,42.22 2.772,42.245 ; 2.772,42.245 2.797,42.27 2.772,42.295 ; 2.772,42.295 2.797,42.32 2.772,42.345 ; 2.772,42.345 2.797,42.37 2.772,42.395 ; 2.772,42.395 2.797,42.42 2.772,42.445 ; 2.772,42.445 2.797,42.47 2.772,42.495 ; 2.772,42.495 2.797,42.52 2.772,42.545 ; 2.772,42.545 2.797,42.57 2.772,42.595 ; 2.772,42.595 2.797,42.62 2.772,42.645 ; 2.772,42.645 2.797,42.67 2.772,42.695 ; 2.772,42.695 2.797,42.72 2.772,42.745 ; 2.772,42.745 2.797,42.77 2.772,42.795 ; 2.772,42.795 2.797,42.82 2.772,42.845 ; 2.772,42.845 2.797,42.87 2.772,42.895 ; 2.772,42.895 2.797,42.92 2.772,42.945 ; 2.772,42.945 2.797,42.97 2.772,42.995 ; 2.772,42.995 2.797,43.02 2.772,43.045 ; 2.772,43.045 2.797,43.07 2.772,43.095 ; 2.772,43.095 2.797,43.12 2.772,43.145 ; 2.772,43.145 2.797,43.17 2.772,43.195 ; 2.772,43.195 2.797,43.22 2.772,43.245 ; 2.772,43.245 2.797,43.27 2.772,43.295 ; 2.772,43.295 2.797,43.32 2.772,43.345 ; 2.772,43.345 2.797,43.37 2.772,43.395 ; 2.772,43.395 2.797,43.42 2.772,43.445 ; 2.772,43.445 2.797,43.47 2.772,43.495 ; 2.772,43.495 2.797,43.52 2.772,43.545 ; 2.772,43.545 2.797,43.57 2.772,43.595 ; 2.772,43.595 2.797,43.62 2.772,43.645 ; 2.772,43.645 2.797,43.67 2.772,43.695 ; 2.772,43.695 2.797,43.72 2.772,43.745 ; 2.772,43.745 2.797,43.77 2.772,43.795 ; 2.772,43.795 2.797,43.82 2.772,43.845 ; 2.772,43.845 2.797,43.87 2.772,43.895 ; 2.772,43.895 2.797,43.92 2.772,43.945 ; 2.772,43.945 2.797,43.97 2.772,43.995 ; 2.772,43.995 2.797,44.02 2.772,44.045 ; 2.772,44.045 2.797,44.07 2.772,44.095 ; 2.772,44.095 2.797,44.12 2.772,44.145 ; 2.772,44.145 2.797,44.17 2.772,44.195 ; 2.772,44.195 2.797,44.22 2.772,44.245 ; 2.772,44.245 2.797,44.27 2.772,44.295 ; 2.772,44.295 2.797,44.32 2.772,44.345 ; 2.772,44.345 2.797,44.37 2.772,44.395 ; 2.772,44.395 2.797,44.42 2.772,44.445 ; 2.772,44.445 2.797,44.47 2.772,44.495 ; 2.772,44.495 2.797,44.52 2.772,44.545 ; 2.772,44.545 2.797,44.57 2.772,44.595 ; 2.772,44.595 2.797,44.62 2.772,44.645 ; 2.772,44.645 2.797,44.67 2.772,44.695 ; 2.772,44.695 2.797,44.72 2.772,44.745 ; 2.772,44.745 2.797,44.77 2.772,44.795 ; 2.772,44.795 2.797,44.82 2.772,44.845 ; 2.772,44.845 2.797,44.87 2.772,44.895 ; 2.772,44.895 2.797,44.92 2.772,44.945 ; 2.772,44.945 2.797,44.97 2.772,44.995 ; 2.772,44.995 2.797,45.02 2.772,45.045 ; 2.772,45.045 2.797,45.07 2.772,45.095 ; 2.772,45.095 2.797,45.12 2.772,45.145 ; 2.772,45.145 2.922,45.145 2.897,45.17 2.922,45.195 ; 2.772,45.145 2.797,45.17 2.772,45.195 ; 2.772,45.195 2.922,45.195 ; 2.772,45.195 2.847,45.27 ; 2.797,21.22 2.922,21.22 ; 2.822,45.295 2.947,45.295 ; 2.822,45.295 2.997,45.47 ; 2.822,45.295 2.847,45.27 ; 2.847,45.27 2.972,45.27 2.947,45.295 ; 2.897,21.045 3.047,21.045 ; 2.897,21.045 2.872,21.02 3.097,21.02 ; 2.897,21.045 2.847,21.095 2.847,45.32 3.022,45.32 2.997,45.345 ; 2.897,21.245 2.922,21.22 ; 2.922,45.195 2.897,45.22 2.797,45.22 2.797,21.17 2.897,21.17 2.922,21.145 2.922,21.02 2.997,20.945 ; 2.947,45.295 2.972,45.32 2.972,45.445 14.397,45.445 ; 2.997,20.945 14.397,20.945 ; 2.997,45.47 14.347,45.47 ; 3.047,20.92 14.347,20.92 ; 3.047,20.92 3.047,21.045 ; 3.047,45.37 3.047,45.495 ; 3.047,45.495 14.297,45.495 ; 3.097,45.395 2.922,45.395 2.922,45.27 2.897,45.245 2.822,45.245 2.822,21.145 2.947,21.145 2.947,20.995 14.522,20.995 14.497,21.02 14.297,21.02 ; 3.147,20.895 14.297,20.895 ; 3.147,45.52 11.097,45.52 ; 3.772,30.395 4.397,30.395 ; 3.772,30.395 3.797,30.42 4.222,30.42 4.222,29.92 ; 3.772,30.395 3.797,30.37 4.547,30.37 ; 3.772,30.495 4.197,30.495 4.222,30.47 ; 3.772,30.495 3.797,30.47 4.222,30.47 ; 3.797,30.17 5.647,30.17 ; 3.797,30.17 3.797,30.87 ; 3.797,30.17 3.822,30.145 5.722,30.145 ; 3.797,30.87 3.822,30.895 3.797,30.92 ; 3.797,30.92 3.797,30.945 ; 3.797,30.945 3.822,30.97 3.797,30.995 ; 3.797,30.995 3.822,31.02 3.797,31.045 ; 3.797,31.045 3.822,31.07 3.797,31.095 ; 3.797,31.095 3.822,31.12 3.797,31.145 ; 3.797,31.145 3.822,31.17 3.797,31.195 ; 3.797,31.195 3.822,31.22 3.797,31.245 ; 3.797,31.245 3.822,31.27 3.797,31.295 ; 3.797,31.82 4.172,31.82 4.197,31.795 ; 3.797,31.82 3.822,31.845 ; 3.797,31.82 3.822,31.795 4.197,31.795 ; 3.797,31.87 4.122,31.87 4.147,31.845 4.147,29.92 ; 3.797,31.87 3.822,31.895 ; 3.797,31.87 3.822,31.845 ; 3.797,31.92 4.072,31.92 4.097,31.895 4.097,29.92 ; 3.797,31.92 3.797,31.945 ; 3.797,31.92 3.822,31.895 ; 3.797,31.945 4.072,31.945 4.072,29.945 4.097,29.92 ; 3.797,31.945 3.822,31.97 ; 3.797,31.995 3.997,31.995 ; 3.797,31.995 3.797,32.02 ; 3.797,31.995 3.822,31.97 ; 3.797,32.02 4.022,32.02 ; 3.797,32.02 3.822,32.045 3.797,32.07 ; 3.797,32.07 3.997,32.07 4.022,32.095 4.022,33.395 ; 3.797,32.07 3.797,32.095 ; 3.797,32.095 4.047,32.095 4.047,33.345 ; 3.797,32.095 3.822,32.12 3.797,32.145 ; 3.797,32.145 4.097,32.145 4.097,33.345 ; 3.797,32.145 3.822,32.17 3.797,32.195 ; 3.797,32.195 4.147,32.195 4.147,33.345 3.922,33.345 ; 3.797,32.195 3.797,32.22 ; 3.797,32.22 4.147,32.22 4.172,32.245 4.172,33.32 3.897,33.32 3.897,30.045 3.922,30.02 ; 3.797,32.22 3.822,32.245 ; 3.797,32.27 3.822,32.295 3.797,32.32 ; 3.797,32.27 3.822,32.245 ; 3.797,32.32 3.822,32.345 3.797,32.37 ; 3.797,32.37 3.822,32.395 3.797,32.42 ; 3.797,32.42 3.822,32.445 3.797,32.47 ; 3.797,32.47 3.822,32.495 3.797,32.52 ; 3.797,32.52 3.822,32.545 3.797,32.57 ; 3.797,32.57 3.822,32.595 3.797,32.62 ; 3.797,32.62 3.822,32.645 3.797,32.67 ; 3.797,32.67 3.822,32.695 3.797,32.72 ; 3.797,32.72 3.822,32.745 3.797,32.77 ; 3.797,32.77 3.822,32.795 3.797,32.82 ; 3.797,32.82 3.822,32.845 3.797,32.87 ; 3.797,32.87 3.822,32.895 3.797,32.92 ; 3.797,32.92 3.822,32.945 3.797,32.97 ; 3.797,32.97 3.822,32.995 3.797,33.02 ; 3.797,33.02 3.822,33.045 3.797,33.07 ; 3.797,33.07 3.822,33.095 3.797,33.12 ; 3.797,33.12 3.822,33.145 3.797,33.17 ; 3.822,30.12 5.872,30.12 ; 3.822,30.12 3.847,30.095 6.072,30.095 ; 3.822,31.845 4.172,31.845 4.172,29.92 4.197,29.895 ; 3.822,31.895 4.122,31.895 4.122,29.945 ; 3.822,31.97 4.022,31.97 4.022,29.97 ; 3.822,32.245 4.197,32.245 4.197,33.295 ; 3.897,33.695 6.422,33.695 ; 3.897,33.695 3.922,33.72 ; 3.897,33.695 3.872,33.72 3.922,33.77 5.972,33.77 ; 3.922,30.02 7.047,30.02 ; 3.922,33.345 3.922,29.995 3.972,29.945 ; 3.922,33.345 3.847,33.27 3.847,30.045 6.322,30.045 ; 3.922,33.72 6.272,33.72 ; 3.922,33.72 3.922,33.695 3.947,33.67 ; 3.947,33.67 3.947,33.72 3.972,33.745 ; 3.972,29.945 3.997,29.945 ; 3.972,29.945 3.997,29.97 ; 3.972,29.995 3.972,33.37 ; 3.972,29.995 3.947,29.97 3.947,33.345 3.972,33.37 ; 3.972,29.995 3.997,29.97 ; 3.972,33.37 4.022,33.37 ; 3.972,33.745 6.122,33.745 ; 3.972,33.745 3.947,33.77 4.072,33.895 4.097,33.87 ; 3.997,29.945 3.997,33.37 4.022,33.395 ; 3.997,29.945 4.022,29.97 ; 3.997,29.97 7.047,29.97 ; 3.997,31.995 4.022,32.02 ; 3.997,31.995 4.047,31.945 4.047,29.945 ; 3.997,33.645 7.072,33.645 ; 3.997,33.645 3.997,33.77 ; 3.997,33.645 3.972,33.67 3.972,33.795 3.997,33.77 ; 3.997,33.77 4.122,33.895 5.297,33.895 ; 4.022,22.995 6.572,22.995 ; 4.022,22.995 4.047,23.02 ; 4.022,22.995 3.972,23.045 4.022,23.095 ; 4.022,23.095 6.022,23.095 ; 4.022,23.095 4.047,23.07 ; 4.022,29.97 4.047,29.945 ; 4.022,33.37 4.047,33.395 ; 4.022,33.37 4.047,33.345 ; 4.022,33.395 4.047,33.395 ; 4.022,33.795 5.822,33.795 ; 4.047,23.02 6.422,23.02 ; 4.047,23.07 6.122,23.07 ; 4.047,28.395 5.122,28.395 ; 4.047,28.395 4.072,28.42 ; 4.047,28.395 4.072,28.37 ; 4.047,29.945 7.022,29.945 7.047,29.97 ; 4.047,33.345 4.097,33.395 4.197,33.295 ; 4.047,33.395 4.097,33.345 ; 4.047,33.82 5.672,33.82 ; 4.072,22.97 6.672,22.97 ; 4.072,22.97 4.072,23.095 4.097,23.12 ; 4.072,28.32 5.572,28.32 ; 4.072,28.32 4.072,28.42 ; 4.072,28.32 4.047,28.295 4.147,28.195 6.322,28.195 ; 4.072,28.37 5.272,28.37 ; 4.072,28.37 4.047,28.345 4.097,28.295 ; 4.072,28.42 4.972,28.42 ; 4.072,33.845 5.572,33.845 ; 4.072,35.67 5.697,35.67 ; 4.072,35.67 4.072,35.645 5.847,35.645 ; 4.072,35.67 4.097,35.695 ; 4.072,35.67 4.047,35.695 4.072,35.72 ; 4.072,35.72 5.322,35.72 ; 4.072,35.72 4.097,35.695 ; 4.097,23.12 5.872,23.12 ; 4.097,23.12 4.072,23.145 5.722,23.145 ; 4.097,28.295 5.722,28.295 ; 4.097,28.295 4.072,28.27 5.872,28.27 ; 4.097,29.92 4.122,29.945 ; 4.097,33.87 5.447,33.87 ; 4.097,33.87 4.097,33.645 4.122,33.62 ; 4.097,35.695 5.497,35.695 ; 4.122,22.945 4.122,23.195 ; 4.122,22.945 4.097,22.92 4.097,23.145 4.122,23.17 5.622,23.17 ; 4.122,22.945 4.147,22.92 6.747,22.92 6.747,22.47 6.447,22.47 ; 4.122,23.195 4.172,23.245 4.197,23.22 ; 4.122,23.195 4.147,23.17 ; 4.122,29.945 4.147,29.92 ; 4.122,33.62 7.047,33.62 7.072,33.645 ; 4.122,33.62 4.122,33.92 5.147,33.92 ; 4.122,35.62 5.972,35.62 ; 4.122,35.62 4.097,35.595 6.122,35.595 ; 4.122,35.62 4.097,35.645 4.097,35.72 4.122,35.745 5.197,35.745 ; 4.147,23.17 4.147,22.895 4.172,22.92 ; 4.147,23.17 4.222,23.245 5.172,23.245 ; 4.147,29.92 7.022,29.92 ; 4.172,22.92 4.172,23.195 ; 4.172,22.92 4.197,22.895 6.772,22.895 ; 4.172,23.195 5.472,23.195 ; 4.197,23.22 5.322,23.22 ; 4.197,23.22 4.197,22.87 4.222,22.895 ; 4.197,28.52 4.197,28.12 6.572,28.12 6.572,27.72 6.547,27.695 ; 4.197,28.52 4.372,28.52 ; 4.197,28.52 4.147,28.47 4.147,28.17 6.472,28.17 ; 4.197,29.895 4.197,31.795 ; 4.197,29.895 4.222,29.92 ; 4.197,33.595 4.197,33.97 4.222,33.995 4.797,33.995 ; 4.197,33.595 4.222,33.62 ; 4.197,33.595 4.172,33.62 4.172,33.97 4.922,33.97 ; 4.222,22.895 4.222,23.27 5.022,23.27 ; 4.222,22.895 4.247,22.87 ; 4.222,29.92 4.247,29.895 ; 4.222,30.47 4.197,30.445 4.247,30.395 ; 4.222,33.62 4.222,34.02 4.247,33.995 ; 4.222,33.62 4.247,33.595 ; 4.222,35.845 4.597,35.845 ; 4.222,35.845 4.222,35.495 4.247,35.47 ; 4.222,35.845 4.147,35.77 4.147,35.545 6.372,35.545 ; 4.247,22.87 6.772,22.87 6.822,22.82 ; 4.247,29.895 6.997,29.895 6.997,31.345 6.672,31.345 ; 4.247,29.895 4.247,30.395 ; 4.247,30.395 4.272,30.42 ; 4.247,33.595 7.047,33.595 7.047,36.045 7.022,36.07 ; 4.247,33.595 4.247,33.995 ; 4.247,33.995 4.272,34.02 4.647,34.02 ; 4.247,35.47 4.247,35.845 4.272,35.87 ; 4.272,35.87 4.272,35.47 4.297,35.445 ; 4.272,35.87 4.447,35.87 ; 4.272,36.745 5.622,36.745 ; 4.272,36.745 4.297,36.77 ; 4.272,36.745 4.297,36.72 5.822,36.72 ; 4.272,36.795 5.272,36.795 ; 4.272,36.795 4.272,36.895 ; 4.272,36.795 4.297,36.77 ; 4.272,36.895 4.597,36.895 ; 4.272,36.895 4.297,36.92 ; 4.297,22.845 4.297,23.295 ; 4.297,22.845 4.322,22.87 ; 4.297,23.295 4.872,23.295 ; 4.297,28.07 6.622,28.07 6.622,27.745 6.597,27.72 ; 4.297,35.445 7.072,35.445 7.097,35.42 7.097,34.92 6.647,34.92 ; 4.297,36.57 6.597,36.57 6.597,36.12 6.622,36.095 7.047,36.095 ; 4.297,36.57 4.297,36.92 ; 4.297,36.57 4.347,36.52 ; 4.297,36.77 5.447,36.77 ; 4.297,36.92 4.472,36.92 ; 4.322,22.87 4.322,23.345 4.347,23.32 ; 4.322,22.87 4.347,22.845 4.372,22.87 ; 4.322,34.07 4.347,34.045 4.372,34.07 ; 4.347,23.32 4.372,23.345 4.647,23.345 ; 4.347,29.87 4.372,29.895 4.397,29.87 ; 4.347,36.52 6.647,36.52 6.647,34.395 ; 4.372,22.87 4.372,23.37 4.397,23.345 4.397,22.82 4.422,22.845 4.447,22.82 ; 4.372,22.87 4.397,22.845 6.797,22.845 6.797,22.495 ; 4.372,28.52 4.372,28.07 4.397,28.045 ; 4.372,28.52 4.397,28.495 4.397,28.045 ; 4.372,33.57 6.997,33.57 7.022,33.595 7.022,36.12 ; 4.372,33.57 4.372,34.07 ; 4.397,28.045 4.422,28.07 4.447,28.045 ; 4.397,29.87 6.972,29.87 6.972,31.37 6.647,31.37 6.672,31.345 ; 4.397,29.87 4.397,30.395 ; 4.422,35.42 7.122,35.42 ; 4.422,36.495 6.672,36.495 6.672,33.245 6.647,33.22 6.172,33.22 ; 4.447,22.82 4.447,23.37 ; 4.447,22.82 4.472,22.82 ; 4.447,23.37 4.472,23.345 ; 4.447,28.045 6.647,28.045 6.647,27.745 ; 4.447,33.545 4.472,33.57 ; 4.472,22.82 4.472,23.345 ; 4.472,22.82 4.497,22.845 ; 4.472,22.82 4.497,22.795 4.522,22.82 ; 4.472,23.345 4.497,23.37 ; 4.472,33.57 4.472,34.045 ; 4.472,33.57 4.497,33.545 ; 4.472,34.045 4.497,34.02 ; 4.497,22.845 4.497,23.37 ; 4.497,22.845 4.547,22.795 ; 4.497,23.37 4.522,23.345 4.522,22.82 ; 4.497,33.545 6.997,33.545 ; 4.497,33.545 4.497,34.02 ; 4.497,34.02 4.522,34.045 ; 4.522,22.82 6.822,22.82 ; 4.522,28.495 4.172,28.495 4.172,28.17 4.197,28.145 6.547,28.145 ; 4.522,29.845 6.947,29.845 ; 4.547,22.795 4.572,22.82 4.597,22.795 ; 4.547,35.395 7.247,35.395 ; 4.572,28.02 6.672,28.02 6.672,27.77 6.647,27.745 ; 4.572,36.47 6.697,36.47 6.697,33.245 6.047,33.245 ; 4.597,22.795 4.622,22.795 ; 4.597,36.895 4.622,36.87 4.647,36.895 ; 4.622,22.795 4.647,22.82 ; 4.622,22.795 4.647,22.77 4.672,22.795 ; 4.622,30.345 4.647,30.32 4.672,30.345 ; 4.622,33.52 6.972,33.52 6.972,36.17 ; 4.647,22.82 4.647,23.345 ; 4.647,22.82 4.697,22.77 ; 4.647,23.345 4.672,23.32 4.672,22.795 ; 4.647,35.37 4.672,35.395 4.697,35.37 ; 4.672,22.795 6.822,22.795 6.897,22.72 ; 4.672,28.47 4.122,28.47 4.122,28.22 6.172,28.22 ; 4.672,28.47 4.672,28.02 4.697,27.995 ; 4.672,28.47 4.697,28.445 4.697,27.995 ; 4.672,29.82 6.897,29.82 6.922,29.845 6.922,31.445 6.747,31.445 6.747,29.695 6.647,29.595 ; 4.672,29.82 4.672,30.345 ; 4.697,22.77 4.722,22.795 4.747,22.77 4.772,22.795 ; 4.697,27.995 4.722,28.02 4.747,27.995 ; 4.697,35.37 7.397,35.37 ; 4.697,35.37 4.697,35.82 ; 4.697,35.82 4.722,35.795 4.747,35.82 ; 4.722,36.445 6.722,36.445 6.722,33.295 6.697,33.27 5.897,33.27 ; 4.747,27.995 4.772,28.02 4.797,27.995 ; 4.747,33.495 6.947,33.495 ; 4.772,22.795 4.772,23.32 ; 4.772,22.795 4.797,22.77 6.847,22.77 6.847,22.545 6.047,22.545 6.022,22.57 ; 4.772,23.32 4.797,23.295 4.797,22.745 4.822,22.77 4.847,22.745 ; 4.772,30.32 4.797,30.295 4.822,30.32 ; 4.772,36.87 4.797,36.845 4.822,36.87 ; 4.797,27.995 6.722,27.995 6.722,27.795 6.697,27.77 ; 4.822,28.445 4.122,28.445 4.097,28.42 4.097,28.245 6.022,28.245 ; 4.822,28.445 4.822,27.995 4.847,27.97 ; 4.822,28.445 4.847,28.42 4.847,27.97 ; 4.822,29.795 6.897,29.795 6.897,31.445 6.872,31.47 6.772,31.47 6.772,29.695 ; 4.822,29.795 4.822,30.32 ; 4.822,35.345 7.522,35.345 ; 4.847,22.745 4.872,22.77 ; 4.847,27.97 4.872,27.995 4.897,27.97 ; 4.872,22.77 4.872,23.295 ; 4.872,22.77 4.922,22.72 ; 4.872,23.295 4.897,23.27 ; 4.872,33.47 6.897,33.47 6.922,33.495 6.922,36.22 5.947,36.22 ; 4.872,36.42 6.747,36.42 6.747,33.295 5.772,33.295 ; 4.897,23.27 4.897,22.745 4.922,22.77 ; 4.897,23.27 4.922,23.295 ; 4.897,27.97 4.922,27.995 4.947,27.97 ; 4.897,35.795 4.897,35.345 4.922,35.32 ; 4.897,35.795 4.922,35.77 4.922,35.32 ; 4.922,22.72 4.947,22.72 ; 4.922,22.72 4.947,22.745 ; 4.922,22.77 4.922,23.295 ; 4.922,22.77 4.947,22.745 ; 4.922,23.295 4.947,23.27 4.947,22.72 ; 4.922,30.295 4.922,29.795 4.947,29.77 ; 4.922,30.295 4.947,30.27 ; 4.922,35.32 4.947,35.345 4.972,35.32 ; 4.947,22.72 4.972,22.745 4.997,22.72 ; 4.947,22.745 6.872,22.745 6.872,22.57 6.797,22.495 ; 4.947,27.97 6.722,27.97 6.747,27.945 6.747,27.795 ; 4.947,29.77 4.947,30.27 ; 4.947,29.77 4.972,29.795 ; 4.947,30.27 4.972,30.295 ; 4.972,29.795 4.972,30.295 ; 4.972,29.795 4.997,29.77 ; 4.972,30.295 4.997,30.27 4.997,29.77 ; 4.972,35.32 7.622,35.32 ; 4.972,36.845 4.972,36.42 4.997,36.395 ; 4.972,36.845 4.997,36.82 4.997,36.395 ; 4.997,22.72 5.022,22.745 ; 4.997,29.77 6.847,29.77 6.847,31.495 ; 4.997,33.445 6.897,33.445 6.897,36.245 5.822,36.245 ; 4.997,36.395 5.022,36.42 5.047,36.395 ; 5.022,22.745 5.022,23.27 ; 5.022,22.745 5.072,22.695 ; 5.022,23.27 5.047,23.245 ; 5.022,33.945 5.047,33.92 5.072,33.945 ; 5.022,35.77 4.122,35.77 4.122,35.595 4.147,35.57 6.297,35.57 ; 5.022,35.77 5.047,35.745 5.072,35.77 ; 5.047,23.245 5.047,22.72 5.072,22.745 ; 5.047,23.245 5.072,23.27 ; 5.047,27.945 5.072,27.97 5.097,27.945 ; 5.047,36.395 6.772,36.395 ; 5.072,22.695 5.097,22.695 ; 5.072,22.695 5.097,22.72 ; 5.072,22.745 5.072,23.27 ; 5.072,22.745 5.097,22.72 ; 5.072,23.27 5.097,23.245 5.097,22.695 ; 5.097,22.695 5.122,22.72 5.147,22.695 ; 5.097,22.72 6.897,22.72 ; 5.097,27.945 6.772,27.945 ; 5.097,29.745 5.097,30.27 ; 5.097,29.745 5.122,29.77 5.147,29.745 ; 5.097,36.37 5.097,36.82 ; 5.097,36.37 5.122,36.395 5.147,36.37 ; 5.097,36.82 5.122,36.795 5.147,36.82 ; 5.122,33.42 6.847,33.42 6.872,33.445 6.872,36.27 5.697,36.27 ; 5.122,35.295 7.797,35.295 ; 5.147,22.695 5.172,22.695 ; 5.147,29.745 5.172,29.77 5.197,29.745 ; 5.147,33.92 5.172,33.895 5.197,33.92 ; 5.147,36.37 5.147,36.82 ; 5.147,36.37 5.172,36.395 5.197,36.37 ; 5.172,22.695 5.172,23.245 ; 5.172,22.695 5.197,22.72 5.247,22.67 ; 5.172,22.695 5.197,22.67 5.222,22.695 ; 5.172,23.245 5.197,23.22 5.222,23.245 ; 5.197,27.92 5.222,27.945 5.247,27.92 ; 5.197,29.745 5.222,29.77 ; 5.197,36.37 6.772,36.37 6.797,36.345 6.797,33.345 5.522,33.345 ; 5.222,22.695 5.222,23.245 ; 5.222,23.245 5.247,23.22 5.247,22.67 ; 5.222,29.77 5.222,30.245 ; 5.222,29.77 5.247,29.745 6.822,29.745 6.822,31.545 6.897,31.62 ; 5.222,30.245 5.247,30.22 5.247,29.72 5.272,29.745 5.297,29.72 ; 5.247,22.67 5.272,22.695 5.297,22.67 ; 5.247,33.395 6.847,33.395 6.847,36.295 5.597,36.295 ; 5.247,35.27 5.272,35.295 5.297,35.27 ; 5.247,36.345 5.272,36.37 ; 5.272,28.37 5.272,27.92 5.297,27.895 ; 5.272,28.37 5.297,28.345 5.297,27.895 ; 5.272,36.37 5.272,36.795 ; 5.272,36.37 5.297,36.345 ; 5.272,36.795 5.297,36.77 ; 5.297,22.67 5.322,22.67 ; 5.297,27.895 5.322,27.92 5.347,27.895 ; 5.297,29.72 5.322,29.745 ; 5.297,33.895 5.322,33.87 5.347,33.895 ; 5.297,35.27 5.322,35.295 ; 5.297,36.345 5.297,36.77 ; 5.297,36.345 5.322,36.37 ; 5.297,36.77 5.322,36.795 ; 5.322,22.67 5.322,23.22 ; 5.322,22.67 5.347,22.695 5.397,22.645 ; 5.322,22.67 5.347,22.645 5.372,22.67 ; 5.322,23.22 5.347,23.195 5.372,23.22 ; 5.322,29.745 5.322,30.22 ; 5.322,29.745 5.347,29.72 ; 5.322,30.22 5.347,30.195 ; 5.322,35.295 5.322,35.72 ; 5.322,35.295 5.347,35.27 ; 5.322,35.72 5.347,35.695 ; 5.322,36.37 5.322,36.795 ; 5.322,36.37 5.347,36.345 ; 5.322,36.795 5.347,36.77 5.347,36.345 ; 5.347,27.895 5.372,27.92 5.397,27.895 ; 5.347,29.72 5.347,30.195 ; 5.347,30.195 5.372,30.22 ; 5.347,33.895 5.347,33.395 5.372,33.37 ; 5.347,33.895 5.372,33.87 5.372,33.37 ; 5.347,35.27 5.347,35.695 ; 5.347,35.27 5.372,35.295 ; 5.347,35.695 5.372,35.72 ; 5.347,36.345 6.822,36.345 6.822,33.395 6.797,33.37 5.372,33.37 ; 5.372,22.67 8.472,22.67 ; 5.372,22.67 5.372,23.22 ; 5.372,23.22 5.397,23.195 5.397,22.645 ; 5.372,30.22 5.372,29.72 5.397,29.695 ; 5.372,30.22 5.397,30.195 5.397,29.695 ; 5.372,35.295 5.372,35.72 ; 5.372,35.295 5.397,35.27 7.922,35.27 ; 5.372,35.72 5.397,35.695 5.397,35.245 5.422,35.27 5.447,35.245 ; 5.397,22.645 5.422,22.67 5.447,22.645 ; 5.397,27.895 7.947,27.895 ; 5.397,29.695 5.422,29.72 5.447,29.695 ; 5.397,36.32 5.422,36.345 5.447,36.32 ; 5.422,28.345 5.422,27.895 5.447,27.87 ; 5.422,28.345 5.447,28.32 5.447,27.87 ; 5.447,22.645 5.472,22.67 ; 5.447,27.87 5.472,27.895 5.497,27.87 ; 5.447,29.695 5.472,29.72 ; 5.447,33.87 5.472,33.845 5.497,33.87 ; 5.447,35.245 5.472,35.27 5.522,35.22 ; 5.447,36.32 6.822,36.32 6.972,36.17 ; 5.447,36.32 5.447,36.77 ; 5.447,36.77 5.472,36.745 5.497,36.77 ; 5.472,22.67 5.472,23.195 ; 5.472,22.67 5.497,22.645 8.622,22.645 ; 5.472,23.195 5.497,23.17 ; 5.472,29.72 5.472,30.195 ; 5.472,29.72 5.497,29.695 ; 5.472,30.195 5.497,30.17 ; 5.497,23.17 5.497,22.62 5.522,22.645 ; 5.497,23.17 5.522,23.195 ; 5.497,27.87 8.097,27.87 ; 5.497,29.695 6.772,29.695 ; 5.497,29.695 5.497,30.17 ; 5.497,30.17 5.522,30.195 ; 5.497,33.87 5.497,33.37 5.522,33.345 ; 5.497,33.87 5.522,33.845 5.522,33.345 ; 5.497,35.695 5.497,35.245 5.522,35.27 5.547,35.245 ; 5.497,35.695 5.522,35.67 5.547,35.695 ; 5.522,22.645 5.522,23.195 ; 5.522,22.645 5.547,22.62 ; 5.522,23.195 5.547,23.17 5.547,22.62 ; 5.522,30.195 5.522,29.695 5.547,29.67 ; 5.522,30.195 5.547,30.17 5.547,29.67 ; 5.522,35.22 5.547,35.22 ; 5.522,35.22 5.547,35.245 ; 5.547,22.62 5.572,22.645 5.597,22.62 ; 5.547,29.67 5.572,29.695 5.597,29.67 ; 5.547,35.22 5.547,35.695 ; 5.547,35.22 5.572,35.245 5.597,35.22 ; 5.547,35.245 8.022,35.245 ; 5.547,36.295 5.572,36.32 5.597,36.295 ; 5.572,28.32 5.572,27.87 5.597,27.845 ; 5.572,28.32 5.597,28.295 5.597,27.845 ; 5.572,33.845 5.597,33.82 5.622,33.845 ; 5.597,22.62 8.772,22.62 ; 5.597,27.845 5.622,27.87 5.647,27.845 ; 5.597,29.67 5.622,29.695 5.647,29.67 6.722,29.67 6.722,31.42 6.922,31.42 7.022,31.32 ; 5.597,35.22 5.622,35.245 5.647,35.22 8.197,35.22 ; 5.622,23.17 5.622,22.62 5.647,22.595 ; 5.622,23.17 5.647,23.145 5.647,22.595 ; 5.622,33.845 5.622,33.345 5.647,33.32 ; 5.622,33.845 5.647,33.82 5.647,33.32 ; 5.622,36.745 5.622,36.295 5.647,36.27 ; 5.622,36.745 5.647,36.72 ; 5.647,22.595 5.672,22.62 5.697,22.595 ; 5.647,27.845 8.172,27.845 ; 5.647,30.17 5.647,29.645 5.672,29.67 5.697,29.645 ; 5.647,33.32 6.747,33.32 6.772,33.345 6.772,36.395 ; 5.647,36.27 5.647,36.72 ; 5.647,36.27 5.672,36.295 ; 5.647,36.72 5.672,36.745 ; 5.672,33.82 5.697,33.795 5.722,33.82 ; 5.672,36.295 5.672,36.745 ; 5.672,36.295 5.697,36.27 ; 5.672,36.745 5.697,36.72 5.697,36.27 ; 5.697,22.595 5.722,22.62 ; 5.697,29.645 5.722,29.67 ; 5.697,35.195 5.697,35.67